# Altium PCB PCB1.PcbDoc
Units mm, origin at the board's own origin, x right, y up, seen from the top; angles counter-clockwise.
Board outline 152.4 x 101.6 mm, 2 copper layers (Top Layer, Bottom Layer); 11 components, 30 nets, 84 pads, 0 vias.
Unrouted connection lines stored in the file: 7.
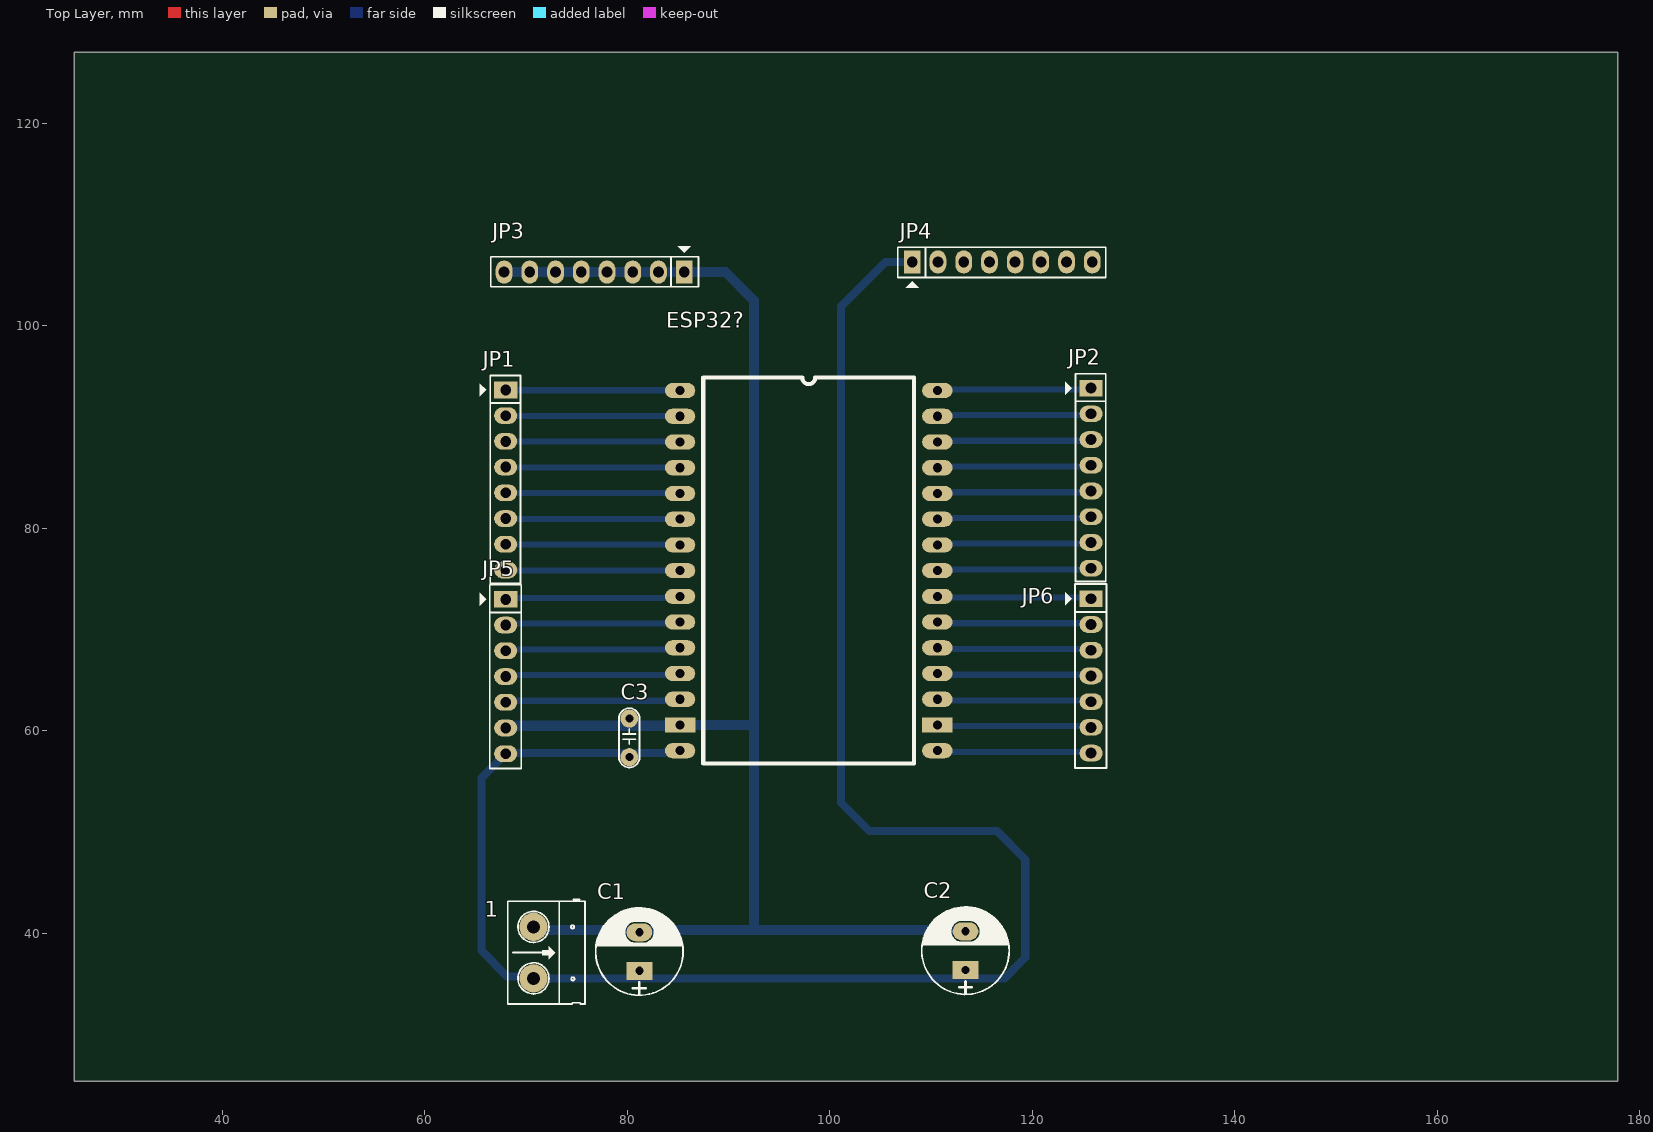
[diagram p0: Top Layer view]
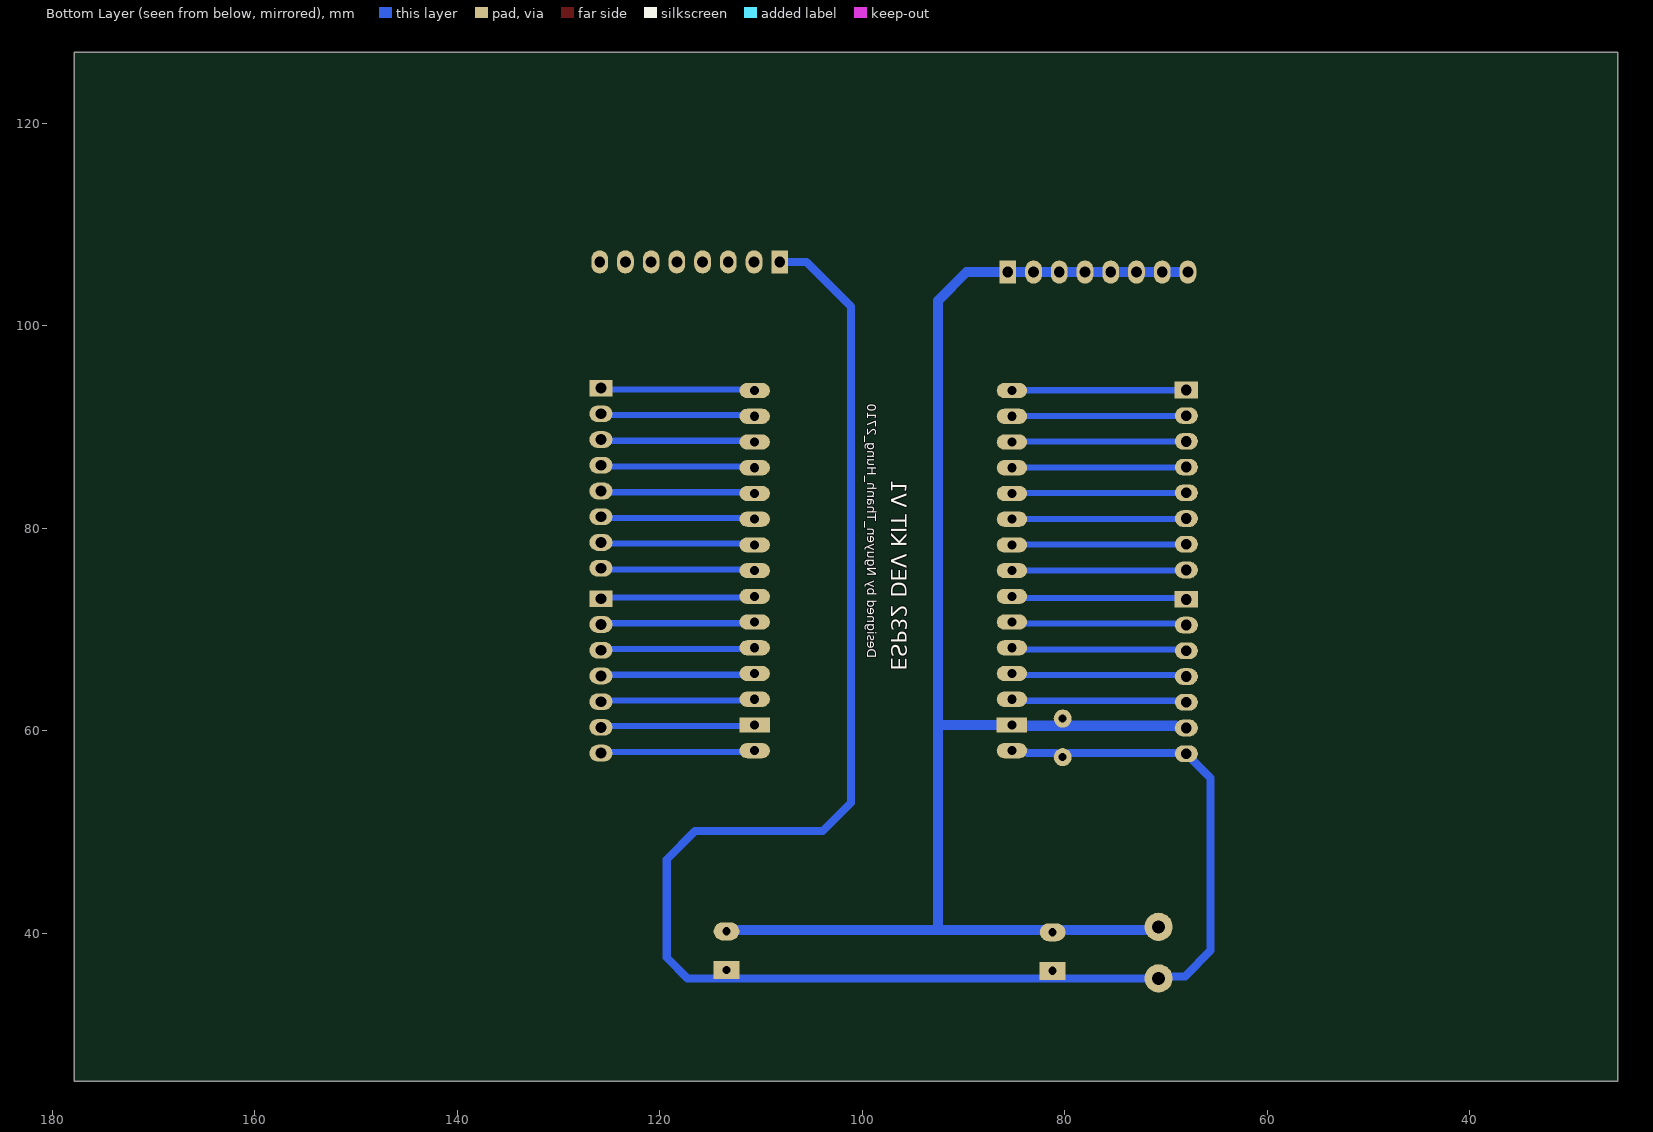
[diagram p1: Bottom Layer view, seen from below]
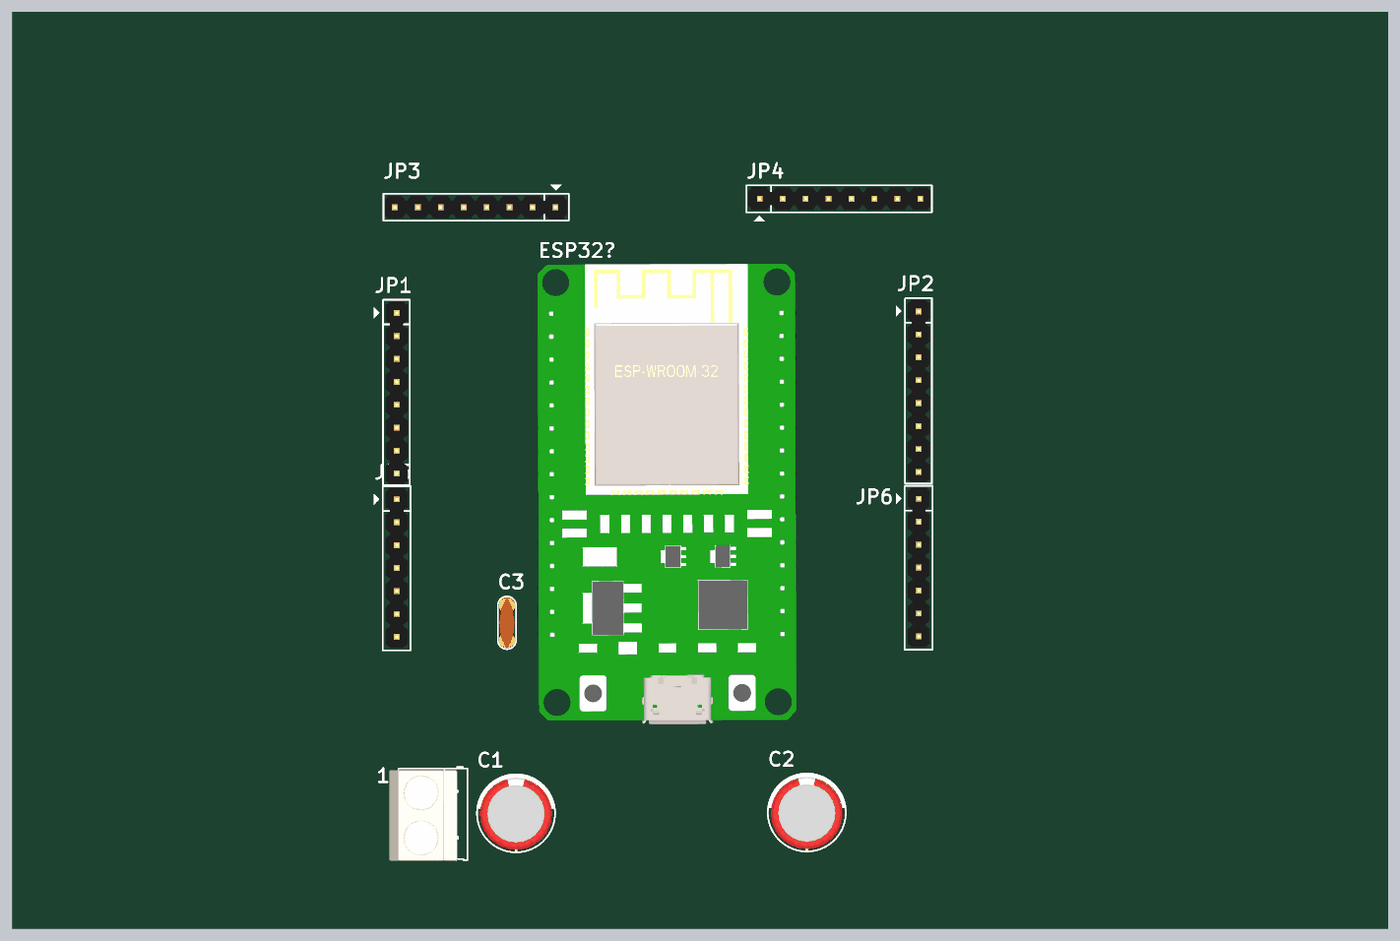
[diagram p2: 3D render of the assembled board from above, using the file's embedded part models]

## Layer stack, top to bottom
Top Solder: solder mask 0.0102, Solder Resist, Dk 3.5
Top Layer: signal copper 0.0356
Dielectric 1: dielectric 0.32, FR-4, Dk 4.8
Bottom Layer: signal copper 0.0356
Bottom Solder: solder mask 0.0102, Solder Resist, Dk 3.5

## Board outline
25.4,25.4 177.8,25.4 177.8,127 25.4,127

## Design rules (kind name [scope] priority, off if disabled: settings)
Clearance [All] p1: gap=0.3 ignorepadtopadclearanceinfootprint=FALSE
PolygonConnect [All] p1: connectstyle=Relief reliefconductorwidth=0.254 reliefentries=4 polygonreliefangle="90 Angle" airgapwidth=0.254
RoutingVias [All] p1: holewidth=0.75 width=1.5 viastyle="Through Hole" minholewidth=0.711 minwidth=1.35 maxholewidth=0.85 maxwidth=1.8
SolderMaskExpansion [All] p1: expansion=0.102 istentingtop=FALSE
Width GND [InNet('GND')] p1: maxlimit=1 minlimit=0.8 preferedwidth=0.9
Width 5V [InNet('+5')] p2: maxlimit=0.8 minlimit=0.6 preferedwidth=0.7
Width NET [InNetClass('All Nets')] p3: maxlimit=0.6 minlimit=0.4 preferedwidth=0.5
30 further rules are at their usual default settings.

## Components (designator, comment, footprint, x,y, rotation, side; value= is the part's Value field where it differs from the comment)
1 "Header 2_1" HED2 70.739,40.64 r270 top value="Header 2"
C1 "1000uF" CP1.5/3.4 81.2,36.3 r90 top value=1000uF/16V
C2 "220uF" CP1.5/3.4 113.4,36.39 r90 top value=1000uF/16V
C3 "104" CN1.5 80.2,61.21 r270 top value=0.01uF
ESP32? "*ESP32 DEV KIT v1" DIP30 85.217,93.599 r0 top
JP1 "JP8 PIN" JP8 68,93.66 r270 top value=JP7
JP2 "JP8 PIN" JP8 125.8,93.84 r270 top value=JP7
JP3 "GND" JP8 85.62,105.297 r180 top value=JP7
JP4 "5V" JP8 108.14,106.3 r0 top value=JP7
JP5 "JP7 PIN" JP7 68,72.98 r270 top value=JP7
JP6 "JP7 PIN" JP7 125.8,73.04 r270 top value=JP7

## Footprints (in the part's own frame and the unit in brackets; to place one, negate y for a bottom-side part, rotate by r counter-clockwise, add the part's x,y. Pads: shape width x height; smd on the part's side, far side on the other; paste and mask are expansions set on the pad)
CN1.5 [mil]
  round 70 hole 31: 1(0,0) 2(150,0)
  silkscreen extent -40,-40 190,40, body extent -40,-33 190,33, height 235
CP1.5/3.4 [mil] "Tu hoa 220->470uF,16V, 470uF/16V,25V"
  rect 70x100 hole 32: 1(0,0)
  oval 70x100 hole 32: 2(150,0)
  silkscreen extent -95,-170 245,170, body extent -85,-157 230,157, height 446
DIP30 [mm]
  oval 3x1.5 hole 0.9: 1(25.4,0) 2(25.4,-2.54) 3(25.4,-5.08) 4(25.4,-7.62) 5(25.4,-10.16) 6(25.4,-12.7) 7(25.4,-15.24) 8(25.4,-17.78) 9(25.4,-20.32) 10(25.4,-22.86) 11(25.4,-25.4) 12(25.4,-27.94) 13(25.4,-30.48) 15(25.4,-35.56) 16(0,-35.56) 18(0,-30.48) 19(0,-27.94) 20(0,-25.4) 21(0,-22.86) 22(0,-20.32) 23(0,-17.78) 24(0,-15.24) 25(0,-12.7) 26(0,-10.16) 27(0,-7.62) 28(0,-5.08) 29(0,-2.54) 30(0,0)
  rect 3x1.5 hole 0.9: 14(25.4,-33.02) 17(0,-33.02)
  silkscreen extent 2.28,-36.83 23.12,1.27, body extent -1.63,-45.52 27.03,5.46, height 4.42
HED2 [mil] "Header 2, 2 pin, hight 300mil, Pin to Pin 200, Colour Green"
  round 110 hole 50: 1(0,0) 2(200,0)
  silkscreen extent -106,-100 300,200, body extent -92,-140 302,155, height 394
JP7 [mil] "JP7"
  rect 65x90 hole 42: 1(0,0)
  oval 65x90 hole 42: 2(100,0) 3(200,0) 4(300,0) 5(400,0) 6(500,0) 7(600,0)
  silkscreen extent -57,-100 658,60, body extent -50,-49 646,49, height 323
JP8 [mil] "JP8"
  rect 65x90 hole 42: 1(0,0)
  oval 65x90 hole 42: 2(100,0) 3(200,0) 4(300,0) 5(400,0) 6(500,0) 7(600,0) 8(700,0)
  silkscreen extent -56,-100 752,57, body extent -48,-50 748,48, height 323

## Part data
1: "Header, 2-Pin", Manufacturer="Generic Components", Class=Connector
C1: library part CP4, "Cap 1000uF/16V - 220uF/50V", Description 1="2200uF-3300uF/6,3V - 1000uF-2200uF/10V", Description 2="1000uF/16V - 470uF => 1000uF/25V - 100uF/100V", Description 3=330uF>470uF/35V_220uF>470uF/50V_10uF>22uF/250V, Description 4="220uF => 330uF/63V - 10uF =>33uF/160 - 200V", Description 5="4,7uF>10uF/250V_3,3uF>10uF/400V - 2,2uF>4,7uF/450V"
C2: library part CP4, Description 1="2200uF-3300uF/6,3V - 1000uF-2200uF/10V", Description 2="1000uF/16V - 470uF => 1000uF/25V - 100uF/100V", Description 3=330uF>470uF/35V_220uF>470uF/50V_10uF>22uF/250V, Description 4="220uF => 330uF/63V - 10uF =>33uF/160 - 200V", Description 5="4,7uF>10uF/250V_3,3uF>10uF/400V - 2,2uF>4,7uF/450V"
C3: library part CN1.5, "Cap np 682pF => 104pF"
ESP32?: library part ESP32v1
JP1 JP2: library part JP8
JP3 JP4: library part JP8, "JP8 PIN"
JP5 JP6: library part JP7

## Nets (pads, with @x,y where several pads share a name; then routed paths per layer and width w, separated by ;. In a path a pad name is that pad's centre, name@x,y a point inside that pad or via, vN(x,y) a via of type N, cw(c..) or ccw(c..) an arc to the next point about the centre after c; other vN are vias at no path point)
+5: 1.2 C1.1 C2.1 C3.2 ESP32?.16 JP4.1 JP4.2 JP4.3 JP4.4 JP4.5 JP4.6 JP4.7 JP4.8 JP5.7 | length 181.9
  Bottom Layer w0.8: ESP32?.16 85.083,57.905 83.838,57.905 83.733,57.8 80.865,57.8 80.652,57.587 80.413,57.587 80.2,57.8 79.987,57.587 79.748,57.587 79.535,57.8 68.06,57.8 JP5.7 67.913,57.74 67.52,57.347 67.52,57.26 65.6,55.34 65.6,38.3 68.142,35.758 70.541,35.758 1.2 117.26,35.56 119.3,37.6 119.3,47.3 116.5,50.1 103.9,50.1 101.1,52.9 101.1,101.9 105.5,106.3 JP4.1
GND: 1.1 C1.2 C2.2 C3.1 ESP32?.17 JP3.1 JP3.2 JP3.3 JP3.4 JP3.5 JP3.6 JP3.7 JP3.8 JP5.6 | length 155.1
  Bottom Layer w1: JP3.8 JP3.7 JP3.6 JP3.5 JP3.4 JP3.3 JP3.2 JP3.1 89.703,105.297 92.5,102.5 92.5,40.449 92.6,40.349 ; JP5.6 68.125,60.405 68.902,60.405 68.998,60.5 85.138,60.5 ESP32?.17 92.1,60.579 ; 1.1 71.03,40.349 92.6,40.349 ; C2.2 113.251,40.349 92.6,40.349
NetESP32?_1: ESP32?.1 JP2.1 | length 15.3
  Bottom Layer w0.6: ESP32?.1 110.738,93.72 125.679,93.72 JP2.1
NetESP32?_2: ESP32?.2 JP2.2 | length 15.3
  Bottom Layer w0.6: ESP32?.2 110.738,91.18 125.679,91.18 JP2.2
NetESP32?_3: ESP32?.3 JP2.3 | length 15.3
  Bottom Layer w0.6: ESP32?.3 110.738,88.64 125.679,88.64 JP2.3
NetESP32?_4: ESP32?.4 JP2.4 | length 15.3
  Bottom Layer w0.6: ESP32?.4 110.738,86.1 125.679,86.1 JP2.4
NetESP32?_5: ESP32?.5 JP2.5 | length 15.3
  Bottom Layer w0.6: ESP32?.5 110.738,83.56 125.679,83.56 JP2.5
NetESP32?_6: ESP32?.6 JP2.6 | length 15.3
  Bottom Layer w0.6: ESP32?.6 110.738,81.02 125.679,81.02 JP2.6
NetESP32?_7: ESP32?.7 JP2.7 | length 15.3
  Bottom Layer w0.6: ESP32?.7 110.738,78.48 125.679,78.48 JP2.7
NetESP32?_8: ESP32?.8 JP2.8 | length 15.3
  Bottom Layer w0.6: ESP32?.8 110.738,75.94 125.679,75.94 JP2.8
NetESP32?_9: ESP32?.9 JP6.1 | length 15.3
  Bottom Layer w0.6: ESP32?.9 110.736,73.16 125.681,73.16 JP6.1
NetESP32?_10: ESP32?.10 JP6.2 | length 15.3
  Bottom Layer w0.6: ESP32?.10 110.736,70.62 125.681,70.62 JP6.2
NetESP32?_11: ESP32?.11 JP6.3 | length 15.3
  Bottom Layer w0.6: ESP32?.11 110.736,68.08 125.681,68.08 JP6.3
NetESP32?_12: ESP32?.12 JP6.4 | length 15.3
  Bottom Layer w0.6: ESP32?.12 110.736,65.54 125.681,65.54 JP6.4
NetESP32?_13: ESP32?.13 JP6.5 | length 15.3
  Bottom Layer w0.6: ESP32?.13 110.736,63 125.681,63 JP6.5
NetESP32?_14: ESP32?.14 JP6.6 | length 15.3
  Bottom Layer w0.6: ESP32?.14 110.736,60.46 125.681,60.46 JP6.6
NetESP32?_15: ESP32?.15 JP6.7 | length 15.3
  Bottom Layer w0.6: ESP32?.15 110.736,57.92 125.681,57.92 JP6.7
NetESP32?_18: ESP32?.18 JP5.5 | length 17.4
  Bottom Layer w0.6: JP5.5 68.15,62.97 85.169,62.97 85.217,63.017 ESP32?.18
NetESP32?_19: ESP32?.19 JP5.4 | length 17.6
  Bottom Layer w0.6: JP5.4 68.15,65.51 84.905,65.51 85.217,65.821 ESP32?.19
NetESP32?_20: ESP32?.20 JP5.3 | length 17.3
  Bottom Layer w0.6: JP5.3 68.15,68.05 85.068,68.05 ESP32?.20
NetESP32?_21: ESP32?.21 JP5.2 | length 17.3
  Bottom Layer w0.6: JP5.2 68.15,70.59 85.068,70.59 ESP32?.21
NetESP32?_22: ESP32?.22 JP5.1 | length 17.3
  Bottom Layer w0.6: JP5.1 68.15,73.13 85.068,73.13 ESP32?.22
NetESP32?_23: ESP32?.23 JP1.8 | length 17.2
  Bottom Layer w0.6: JP1.8 68.031,75.85 85.186,75.85 ESP32?.23
NetESP32?_24: ESP32?.24 JP1.7 | length 17.2
  Bottom Layer w0.6: JP1.7 68.031,78.39 85.186,78.39 ESP32?.24
NetESP32?_25: ESP32?.25 JP1.6 | length 17.2
  Bottom Layer w0.6: JP1.6 68.031,80.93 85.186,80.93 ESP32?.25
NetESP32?_26: ESP32?.26 JP1.5 | length 17.2
  Bottom Layer w0.6: JP1.5 68.031,83.47 85.186,83.47 ESP32?.26
NetESP32?_27: ESP32?.27 JP1.4 | length 17.2
  Bottom Layer w0.6: JP1.4 68.031,86.01 85.186,86.01 ESP32?.27
NetESP32?_28: ESP32?.28 JP1.3 | length 17.2
  Bottom Layer w0.6: JP1.3 68.031,88.55 85.186,88.55 ESP32?.28
NetESP32?_29: ESP32?.29 JP1.2 | length 17.2
  Bottom Layer w0.6: JP1.2 68.031,91.09 85.186,91.09 ESP32?.29
NetESP32?_30: ESP32?.30 JP1.1 | length 17.2
  Bottom Layer w0.6: JP1.1 68.031,93.63 85.186,93.63 ESP32?.30

## Text inside footprints (layer, text, board x,y; h text height)
ESP32?: Bottom Overlay "Designed by Nguyen_Thanh_Hung_2710" at 99.822,67.183 h1.52 r90; Bottom Overlay "ESP32 DEV KIT V1" at 97.155,65.913 h1.52 r90